# Altium PCB HumTemp_ESP32_BKP.PcbDoc
Units mm, origin at the board's own origin, x right, y up, seen from the top; angles counter-clockwise.
Board outline 66 x 92 mm, 2 copper layers (Top Layer, Bottom Layer); 15 components, 9 nets, 90 pads, 0 vias.
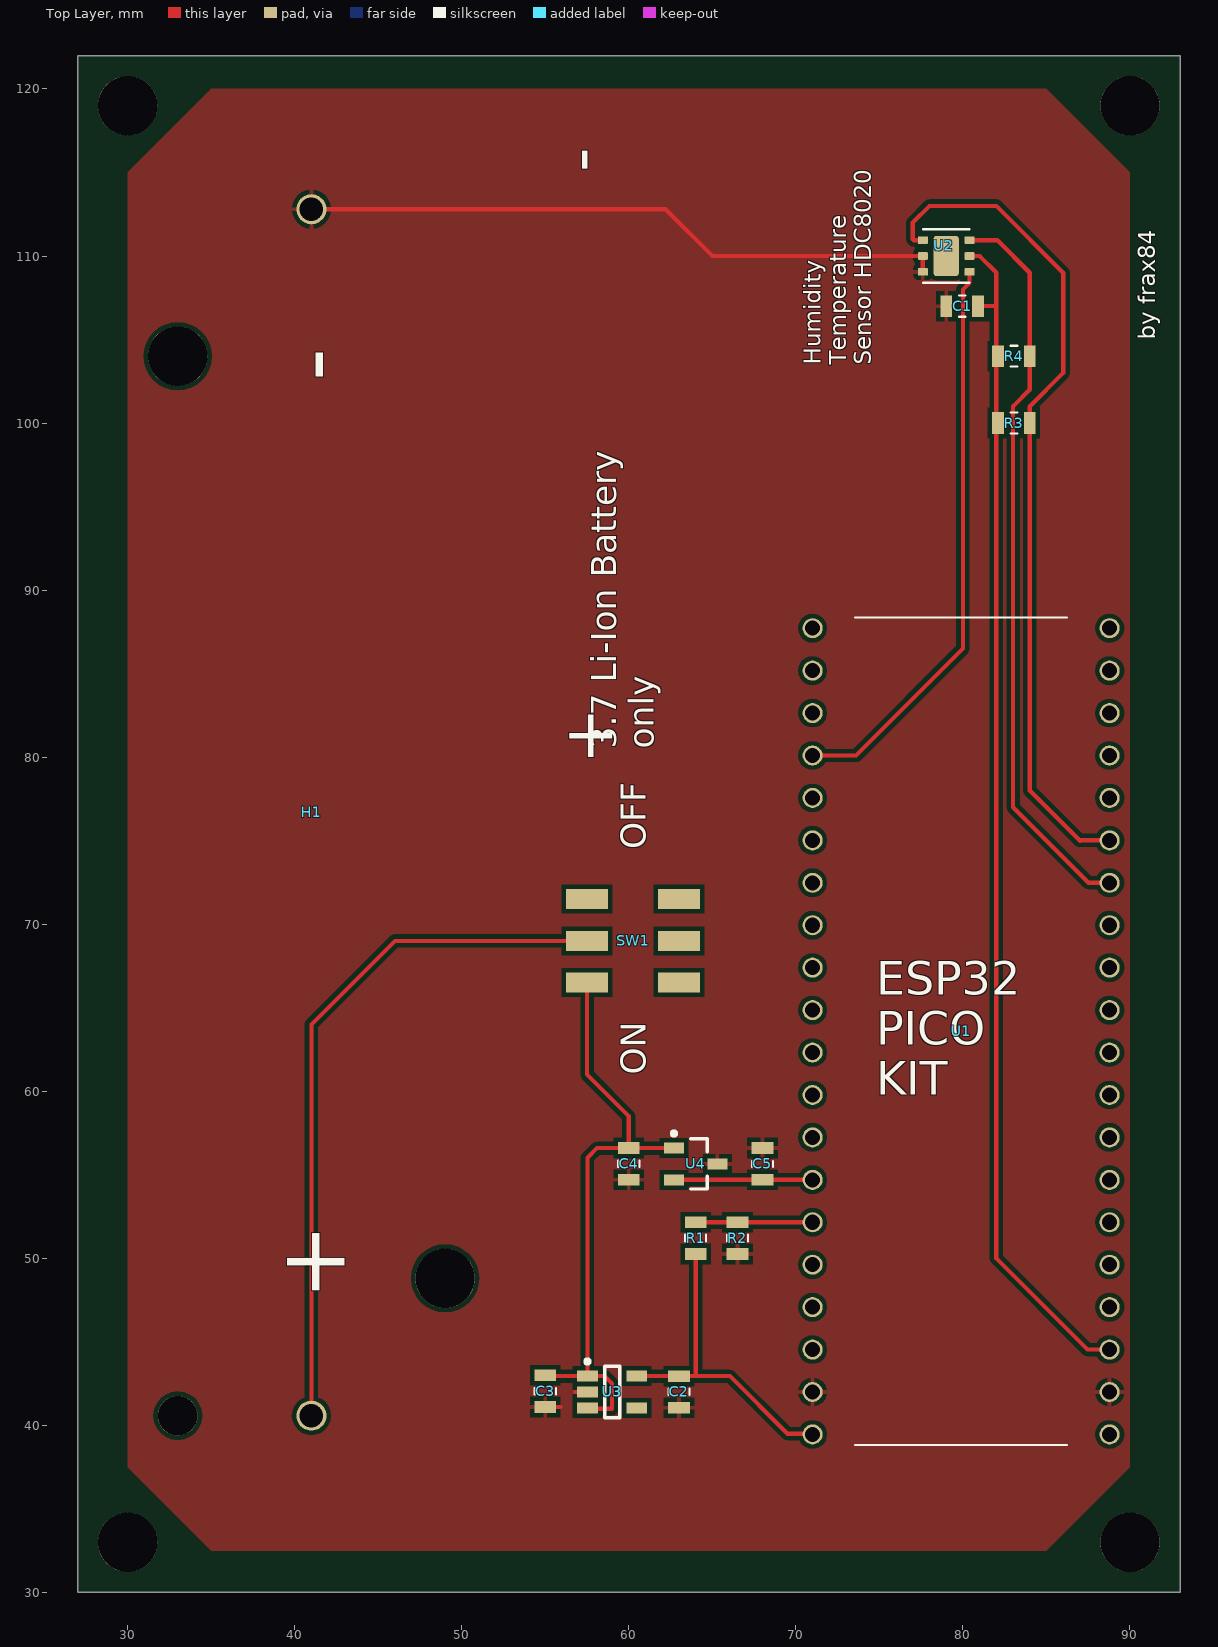
[diagram p0: Top Layer view]
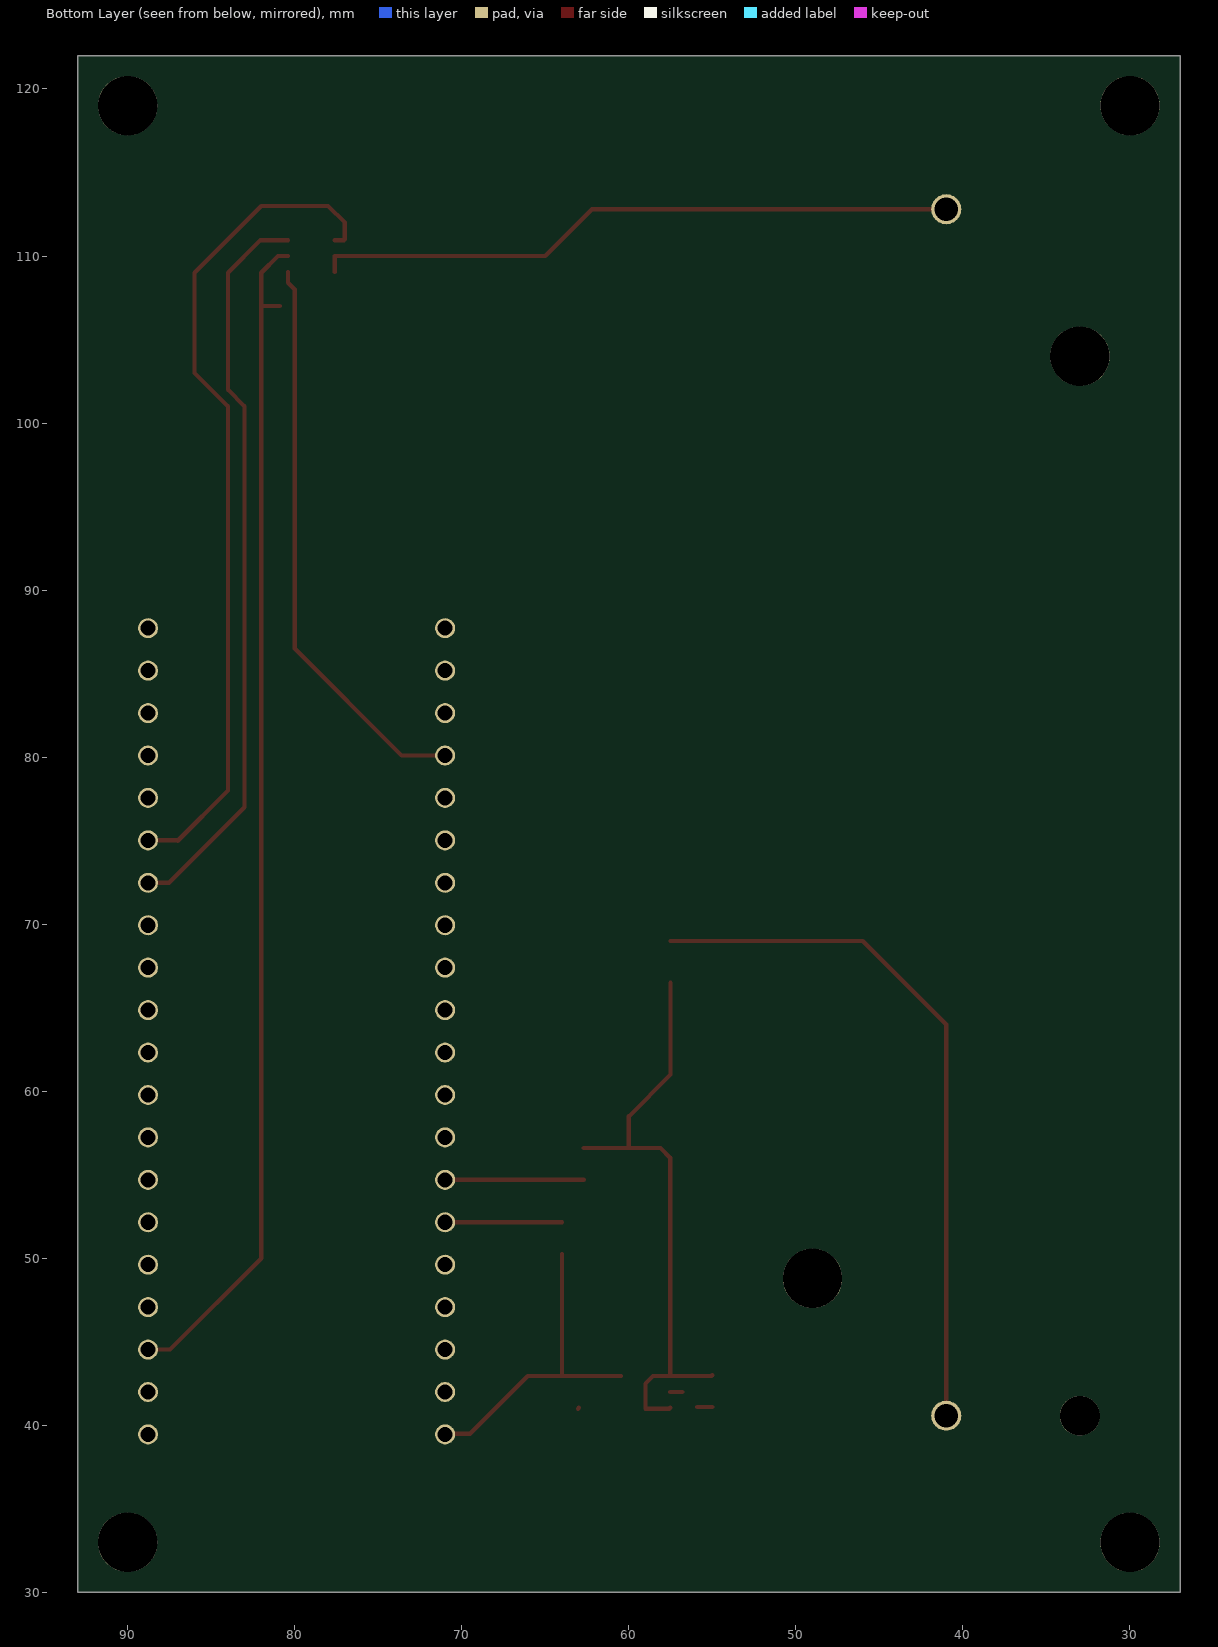
[diagram p1: Bottom Layer view, seen from below]
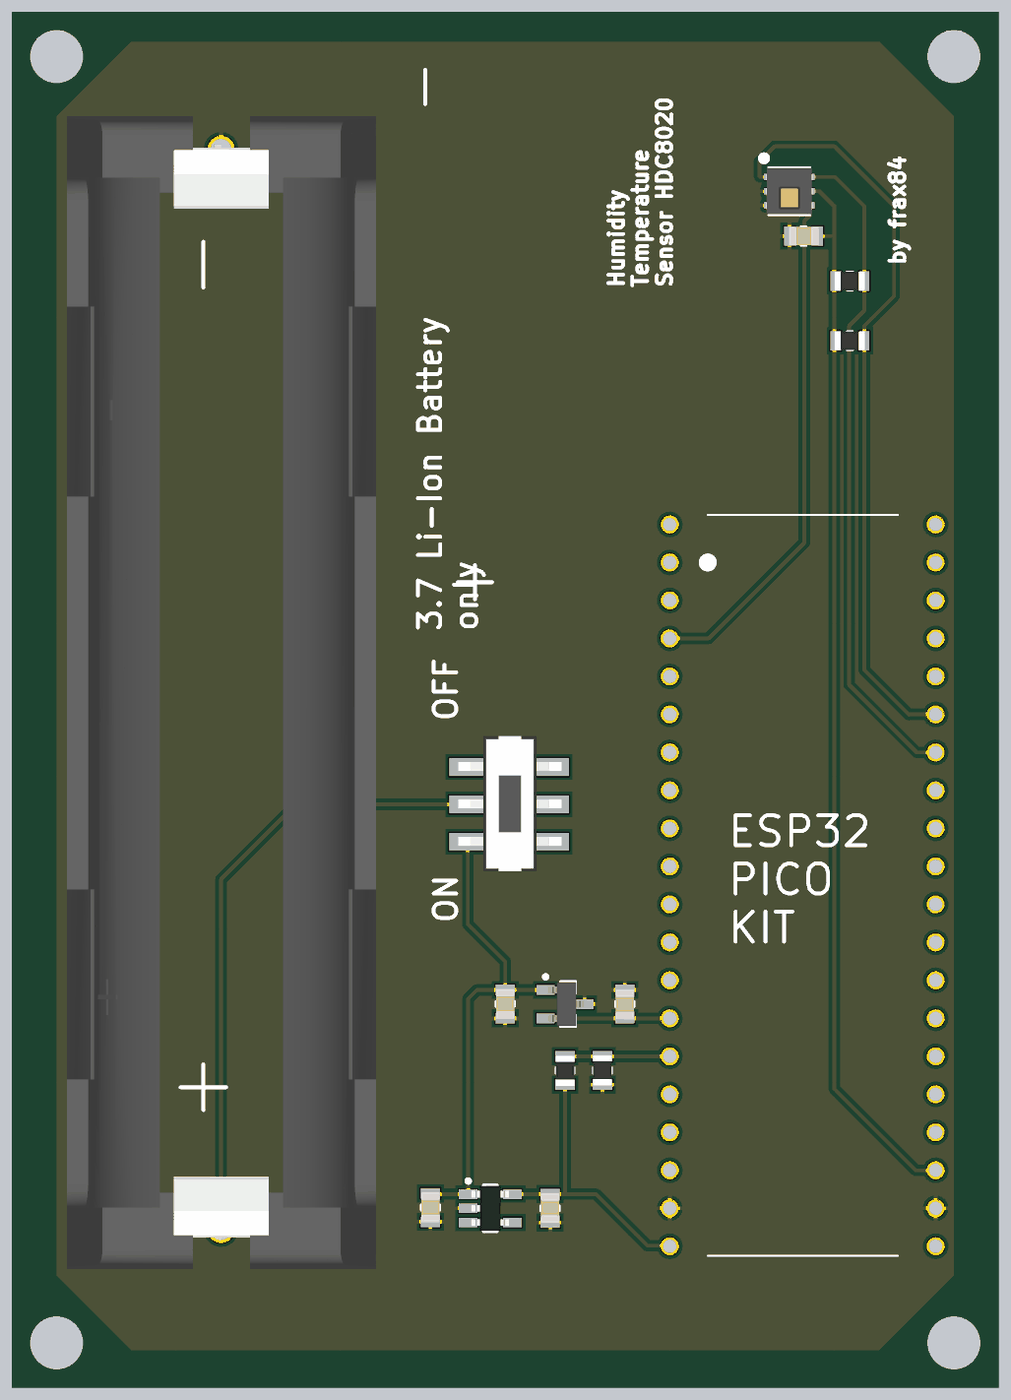
[diagram p2: 3D render of the assembled board from above, using the file's embedded part models]

## Layer stack, top to bottom
Top Solder: solder mask 0.0102, Solder Resist, Dk 3.5
Top Layer: signal copper 0.0356
Dielectric 1: dielectric 0.32, FR-4, Dk 4.8
Bottom Layer: signal copper 0.0356
Bottom Solder: solder mask 0.0102, Solder Resist, Dk 3.5

## Board outline
27,30 93,30 93,122 27,122

## Design rules (kind name [scope] priority, off if disabled: settings)
Clearance [All] p1: gap=0.254
HoleSize [All] p1: absolutevalues=TRUE maxlimit=5.08 minlimit=0.025 maxpercent=80.000 minpercent=20.000
MinimumSolderMaskSliver [All] p1: minsoldermaskwidth=0.127
PolygonConnect [All] p1: connectstyle=Relief reliefconductorwidth=0.254 reliefentries=4 polygonreliefangle="90 Angle" airgapwidth=0.254
RoutingVias [All] p1: holewidth=0.711 width=1.27 viastyle="Through Hole" minholewidth=0.711 minwidth=1.27 maxholewidth=0.711 maxwidth=1.27
SolderMaskExpansion [All] p1: expansion=0.102
Width [All] p1: maxlimit=0.254 minlimit=0.254 preferedwidth=0.254
28 further rules are at their usual default settings.

## Components (designator, comment, footprint, x,y, rotation, side; value= is the part's Value field where it differs from the comment)
C1 "SMD Capacitor" CAPCERAMIC_SMD_2012M_0805I 79,107 r0 top
C2 "SMD Capacitor" CAPCERAMIC_SMD_2012M_0805I 63,41.05 r90 top
C3 "SMD Capacitor" CAPCERAMIC_SMD_2012M_0805I 55,41.1 r90 top
C4 "SMD Capacitor" CAPCERAMIC_SMD_2012M_0805I 60,54.7 r90 top
C5 "SMD Capacitor" CAPCERAMIC_SMD_2012M_0805I 68,56.6 r270 top
H1 "18650 Battery holder - Keystone" 18650_BATTERYHOLDER 41,112.8 r270 top
R1 "SMD Resistor" RES_SMD_2012M-0805I 64,52.16 r270 top
R2 "SMD Resistor" RES_SMD_2012M-0805I 66.5,50.26 r90 top
R3 "SMD Resistor" RES_SMD_2012M-0805I 84,100 r180 top
R4 "SMD Resistor" RES_SMD_2012M-0805I 84,104 r180 top
SW1 "SwitchDPDT_JS202011SCQN" SWITCHDPDT 63,71.5 r270 top
U1 "ESP32-PICO-KIT" ESP32-PICO-KIT 71,87.72 r0 top
U2 "HDC2080" WSON6 77.6,111 r0 top
U3 "AP2112-3.3V" SOT95P285X110-5M 59,42 r0 top
U4 "REF3312" SOT95P237X112-3M 64,55.65 r0 top

## Footprints (in the part's own frame and the unit in brackets; to place one, negate y for a bottom-side part, rotate by r counter-clockwise, add the part's x,y. Pads: shape width x height; smd on the part's side, far side on the other; paste and mask are expansions set on the pad)
18650_BATTERYHOLDER [mm]
  round 1.8 hole 1.4 mask+0.07: 1(0,0) 2(72.22,0)
  round 3.55 hole 3.55 unplated paste+0 mask+0: ""(8.8,-8) ""(64,8)
  round 2.39 hole 2.39 unplated paste+0 mask+0: ""(72.22,-8)
  body extent -2.2,-10.3 74.85,10.35, height 14.86
CAPCERAMIC_SMD_2012M_0805I [mm] "2012 Metric - 0805 Imperial"
  rect 0.7x1.3 smd: 1(0,0) 2(1.9,0)
  silkscreen extent 0.76,-0.64 1.14,0.64, body extent -0.03,-0.62 1.97,0.63, height 0.59
ESP32-PICO-KIT [mm] "ESP32 Pico module development kit"
  round 1.2 hole 0.9 mask+0.07: 0(0,0) 1(0,-2.54) 2(0,-5.08) 4(0,-7.62) 5(0,-10.16) 6(0,-12.7) 7(0,-15.24) 8(0,-17.78) 9(0,-20.32) 10(0,-22.86) 11(0,-25.4) 12(0,-27.94) 13(0,-30.48) 14(0,-33.02) 15(0,-35.56) 16(0,-38.1) 17(0,-40.64) 18(0,-43.18) 19(0,-45.72) 20(0,-48.26) 21(17.78,0) 22(17.78,-2.54) 23(17.78,-5.08) 24(17.78,-7.62) 25(17.78,-10.16) 26(17.78,-12.7) 27(17.78,-15.24) 28(17.78,-17.78) 29(17.78,-20.32) 30(17.78,-22.86) 31(17.78,-25.4) 32(17.78,-27.94) 33(17.78,-30.48) 34(17.78,-33.02) 35(17.78,-35.56) 36(17.78,-38.1) 37(17.78,-40.64) 38(17.78,-43.18) 39(17.78,-45.72) 40(17.78,-48.26)
  round 1.2 on Top Overlay mask+0.07: ""(2.54,-2.54)
  silkscreen extent 2.54,-48.89 15.24,0.64
RES_SMD_2012M-0805I [mm] "2012 Metric - 0805 Imperial"
  rect 0.7x1.3 smd: 1(0,0) 2(1.9,0)
  silkscreen extent 0.75,-0.63 1.15,0.63, body extent -0.03,-0.62 1.97,0.63, height 0.6
SOT95P237X112-3M [mm] "SOT23, 3-Leads, Body 2,92x2,37mm, Pitch 0,95mm, IPC Low Density"
  rect 1.2x0.65 smd: 1(-1.3,0.95) 2(-1.3,-0.95) 3(1.3,0)
  silkscreen extent -1.42,-1.5 0.7,1.95, body extent -1.15,-1.46 1.33,1.46, height 1
SOT95P285X110-5M [mm] "SOT23, 5-Leads, Body 3,00x2,85mm, Pitch 0,95mm, IPC Low Density"
  rect 1.25x0.65 smd mask+0.07: 1(-1.475,0.95) 2(-1.475,0) 3(-1.475,-0.95)
  rect 1.25x0.65 smd: 4(1.475,-0.95) 5(1.475,0.95)
  silkscreen extent -1.6,-1.55 0.45,1.95, body extent -1.25,-1.5 1.25,1.5, height 1.07
SWITCHDPDT [mm]
  rect 1.2x2.5 smd: 0(0,0) 1(2.5,0) 2(5,0) 3(0,-5.5) 4(2.5,-5.5) 5(5,-5.5)
  body extent -2.06,-6.14 6.99,0.76, height 5.45
WSON6 [mm]
  rrect20% 0.6x0.45 smd mask+0.05: 1(0,-0.05) 2(0,-1) 3(0,-1.95) 4(2.8,-1.95) 5(2.8,-1) 6(2.8,-0.05)
  round 0.8 on Top Overlay mask+0.07: 3(-0.3,1.2)
  rrect20% 1.5x2.4 smd mask+0.05: ""(1.4,-1)
  silkscreen extent 0,-2.6 2.8,0.6, body extent -0.15,-2.5 2.95,0.5

## Part data
C1 C2 C3 C4 C5: library part capceramic_SMD, "Ceramic SMD capacitor"
R1 R2 R3 R4: library part resistor_SMD
U2: "High precision humidity and temperature sensor"
U3: "AP2112 - 3.3V voltage regulator"
U4: "Voltage reference 1.25V"

## Free pads (board coordinates)
  round 3.55 hole 3.55 unplated paste+0 mask+0: 0(30,119) 1(90,119) 2(90,33) ""(30,33)

## Nets (pads, with @x,y where several pads share a name; then routed paths per layer and width w, separated by ;. In a path a pad name is that pad's centre, name@x,y a point inside that pad or via, vN(x,y) a via of type N, cw(c..) or ccw(c..) an arc to the next point about the centre after c; other vN are vias at no path point)
ADC_REF: C5.2 U1.14 U4.2 | length 8.3
  Top Layer w0.254: U4.2 C5.2 U1.14
ADC_TEST: R1.1 R2.2 U1.15 | length 7
  Top Layer w0.254: R1.1 R2.2 U1.15
GND: C1.1 C2.1 C3.1 C4.1 C5.1 H1.1 R2.1 U1.19 U1.39 U2.2 U2.3@77.6,109.05 U3.2 U4.3 | length 40.4
  Top Layer w0.254: H1.1 62.2,112.8 65,110 73,110 U2.2 U2.3@77.6,109.05 ; C3.1 55.9,41.1 ; 56.8,42 U3.2 ; C2.1 C2.1@63.05,41
INT: U1.4 U2.4 | length 34.4
  Top Layer w0.254: U1.4 73.6,80.1 80,86.5 80,108 80.4,108.4 U2.4
SCL: R4.1 U1.27 U2.6 | length 44.5
  Top Layer w0.254: U2.6 82.05,110.95 84,109 R4.1 84,102 83,101 83,77 87.52,72.48 U1.27
SDA: R3.1 U1.26 U2.1 | length 50.6
  Top Layer w0.254: U2.1 77.05,110.95 77,111 77,112 78,113 82,113 86,109 86,103 84,101 R3.1 84,78 87,75 87.02,75.02 U1.26
SWITCH_VDD: H1.2 SW1.4 | length 42
  Top Layer w0.254: H1.2 41,64 46,69 SW1.4
VBATT: C3.2 C4.2 SW1.5 U3.1 U3.3 U4.1 | length 36.6
  Top Layer w0.254: C3.2 55.05,42.95 U3.1 ; SW1.5 57.5,61 60,58.5 C4.2 ; U3.3 57.575,41 59,41 59,42.5 58.55,42.95 U3.1 ; U4.1 C4.2 ; U3.1 57.525,56.025 58.1,56.6 C4.2
VDD3.3: C1.2 C2.2 R1.2 R3.2 R4.2 U1.20 U1.38 U2.5 U3.5 | length 90.8
  Top Layer w0.254: U3.5 C2.2 64,42.95 ; R1.2 64,42.95 ; U1.20@71.22,39.22 70.94,39.5 69.5,39.5 66.05,42.95 64,42.95 ; U2.5 81,110 82,109 82,107 ; C1.2 82,107 ; U1.38 87.46,44.54 82,50 82,107
pads on no net: H1. SW1.0 SW1.1 SW1.2 SW1.3 U1. U1.0 U1.1 U1.2 U1.5 U1.6 U1.7 U1.8 U1.9 U1.10 U1.11 U1.12 U1.13 U1.16 U1.17 U1.18 U1.21 U1.22 U1.23 U1.24 U1.25 U1.28 U1.29 U1.30 U1.31 U1.32 U1.33 U1.34 U1.35 U1.36 U1.37 U1.40 U2. U2.3@77.3,112.2 U3.4

## Polygon pours and split planes (outlines as drawn)
GND on Top Layer "GND" (solid, remove dead copper, pour order 8): 30,115 35,120 85,120 90,115 90,37.5 85,32.5 35,32.5 30,37.5 30,115

## Silkscreen, mask and mechanical layers (free items; w line width, h text height)
Top Overlay:
  text "-" at 58.5,115 h3 r90
  text "by frax84" at 91.5,105 h1 r90
  text "Humidity / Temperature / Sensor HDC8020" at 74.5,103.5 h1 r90
  text "-" at 43,102.5 h4 r90
  text "3.7 Li-Ion Battery  / only" at 61.5,80.5 h1.5 r90
  text "+" at 56,80 h3
  text "OFF" at 61,74.5 h1.5 r90
  text "ON" at 61,61 h1.5 r90
  text "+" at 43,47.5 h4 r90
Mechanical 13:
  lines w0.127: 50.5,0 51.5,0 ; 27,30 93,30 93,122 27,122 27,30

## Text inside footprints (layer, text, board x,y; h text height)
U1: Top Overlay "ESP32 / PICO / KIT" at 74.81,59.78 h2